# Altium PCB BLDC_Gimbal.PcbDoc (part 1 of 3)
Units mil, origin at the board's own origin, x right, y up, seen from the top; angles counter-clockwise.
Board outline 4133.86 x 2204.72 mil, 4 copper layers (Top Layer, GND, Power, Bottom Layer), stack 23.756 mil thick; 131 components, 105 nets, 517 pads, 595 vias.
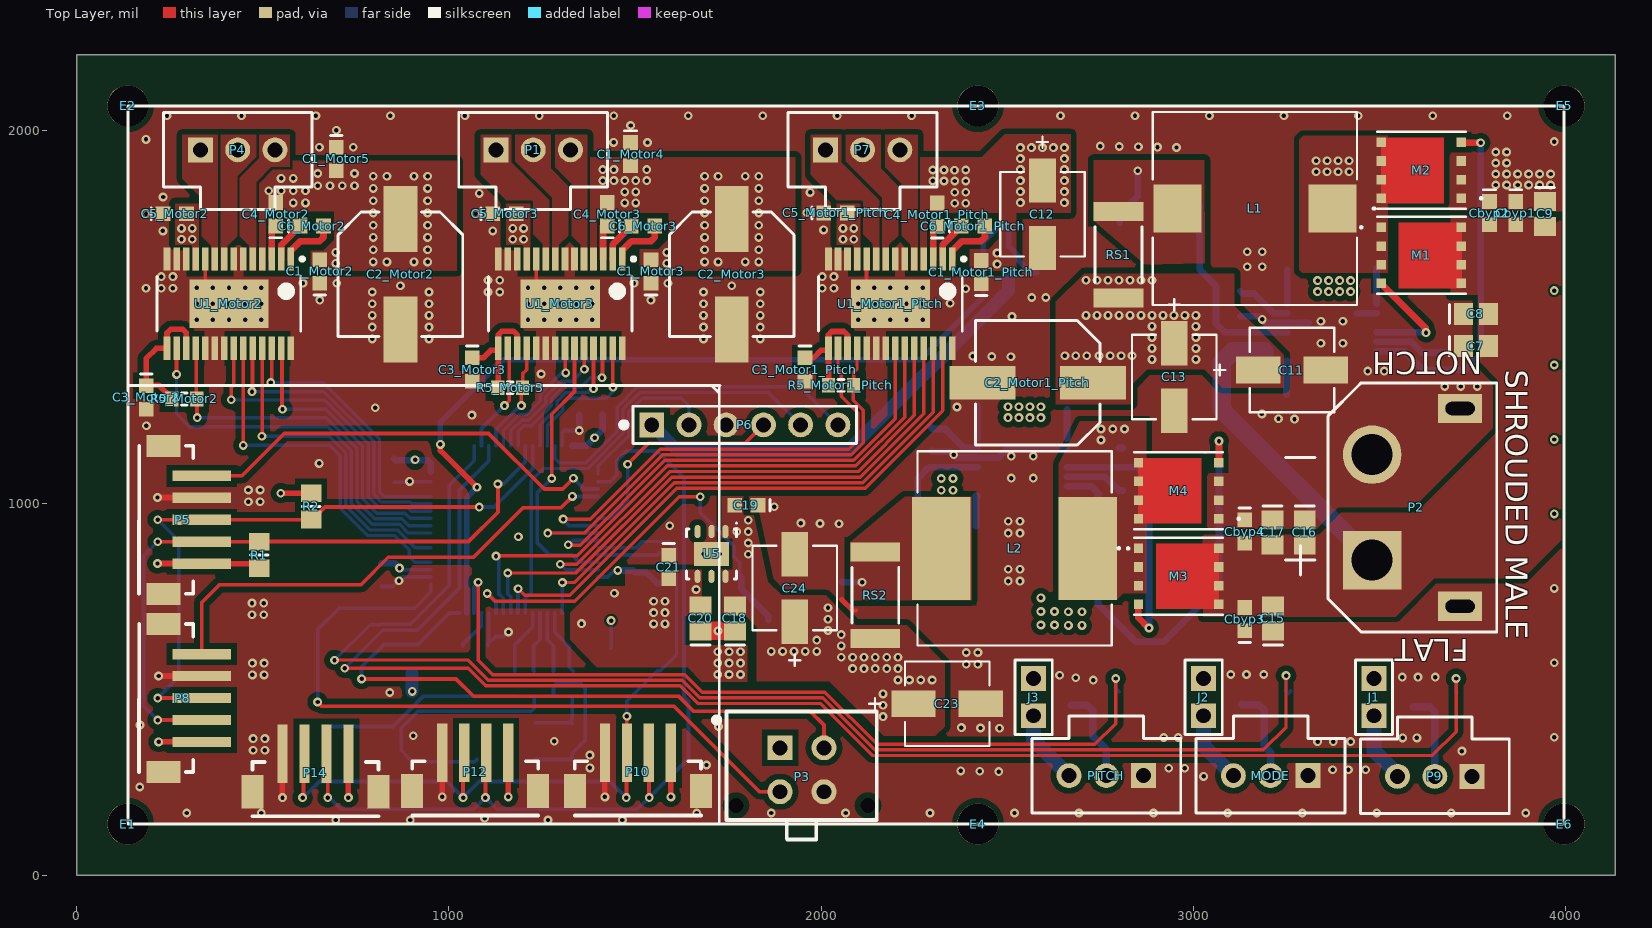
[diagram p0: Top Layer view]
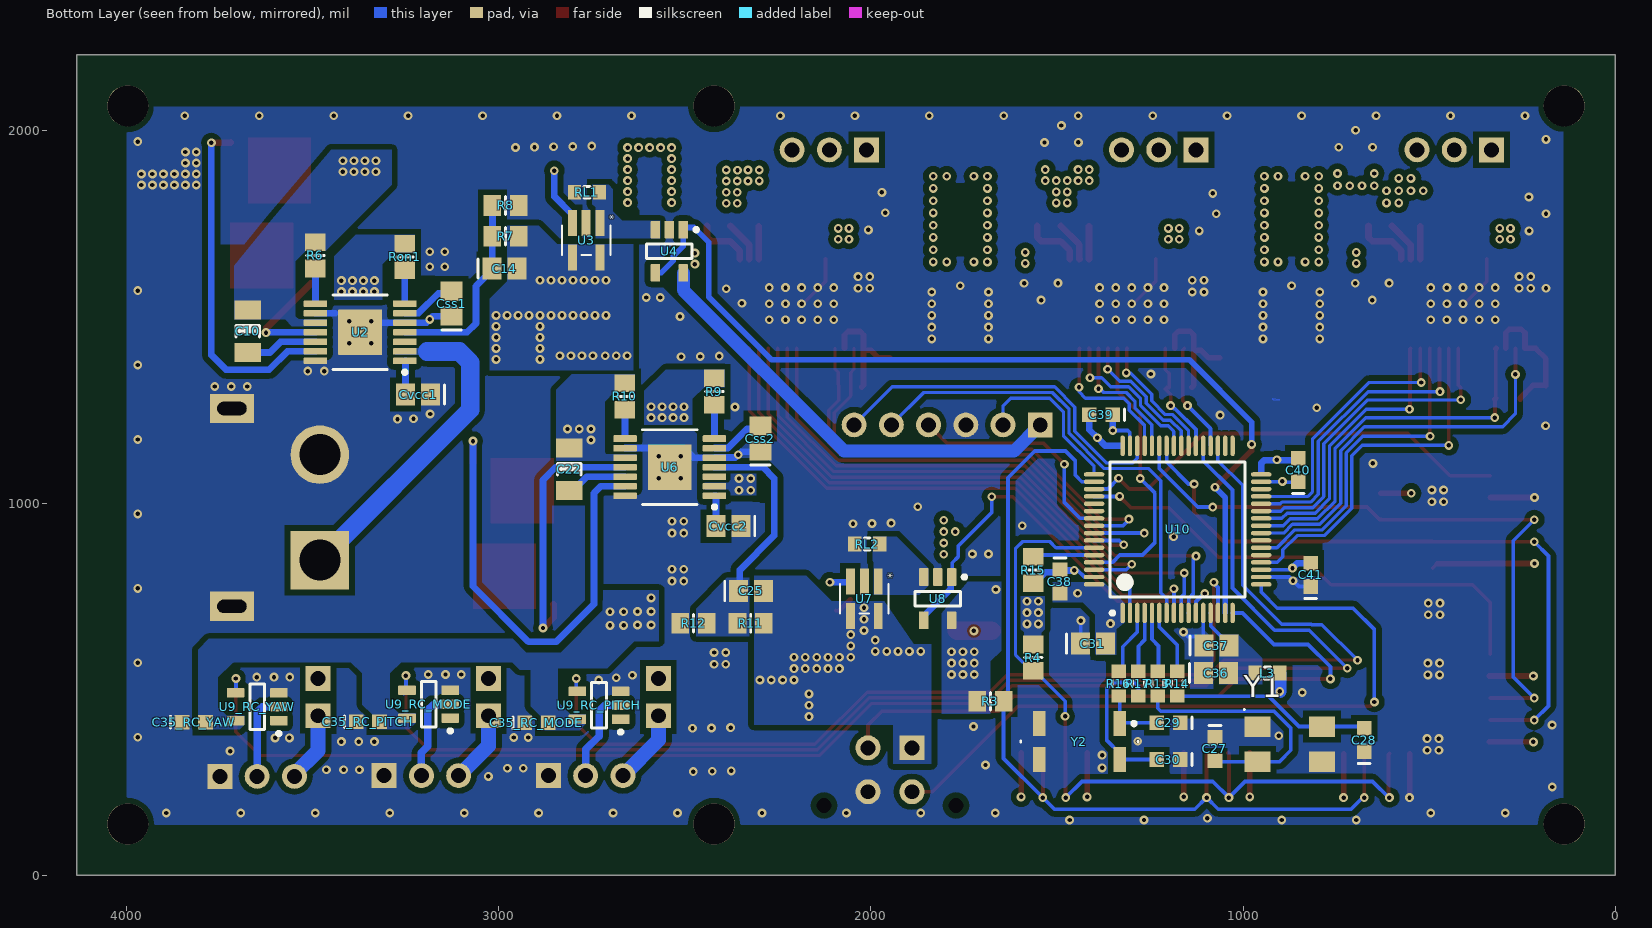
[diagram p1: Bottom Layer view, seen from below]
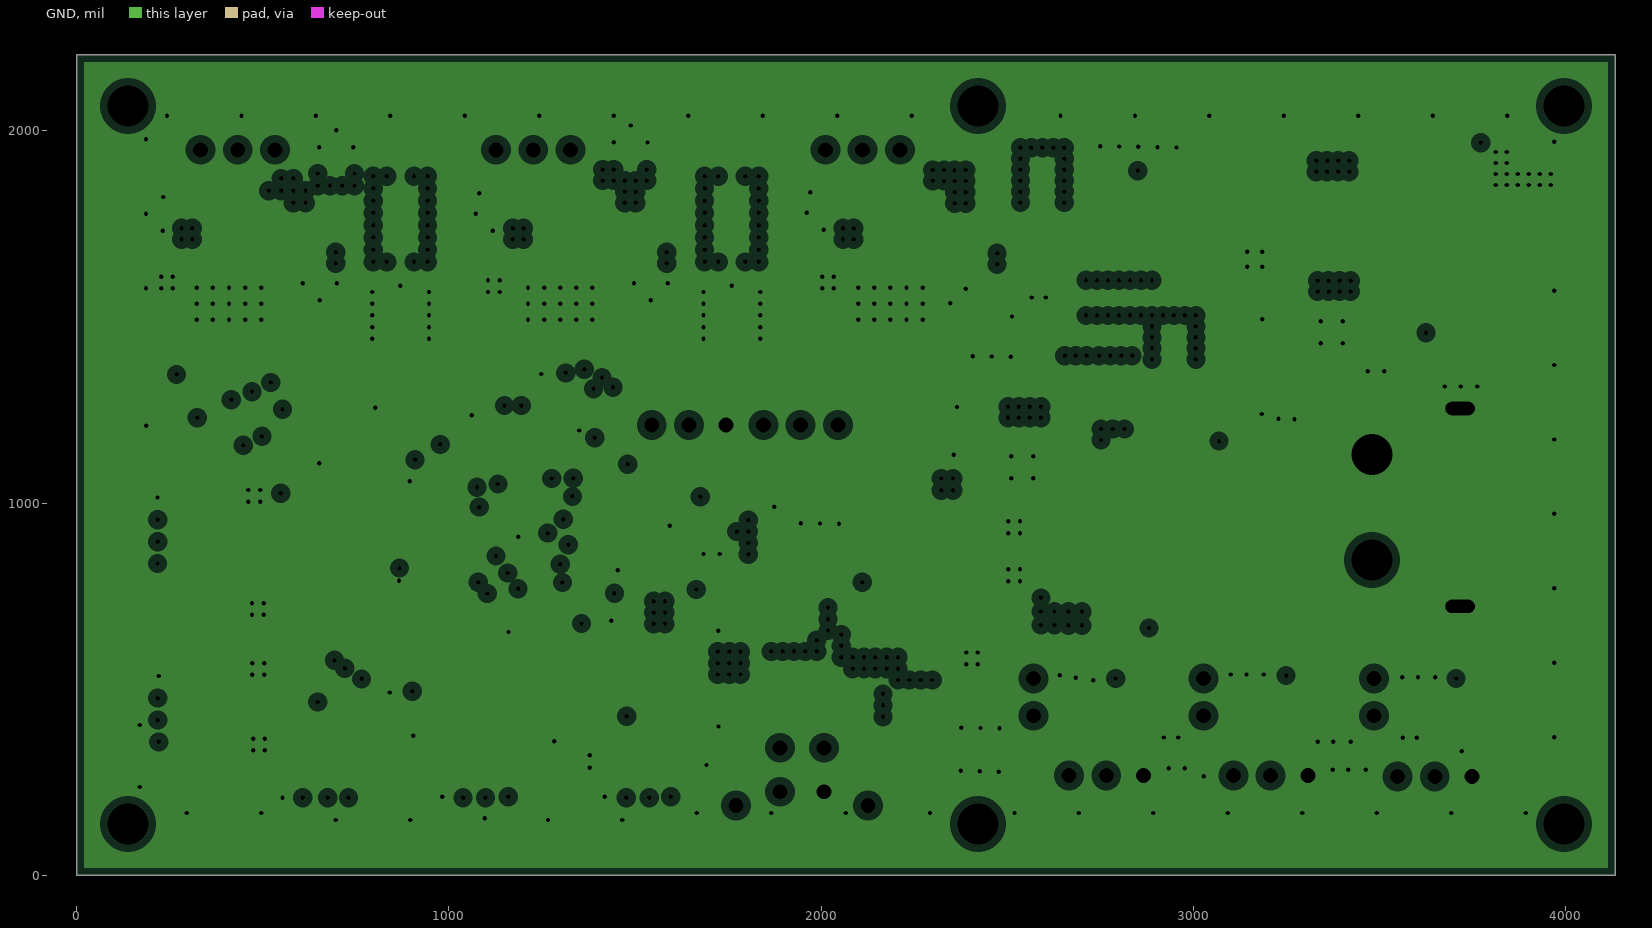
[diagram p2: GND, clearances drawn from the general rule]
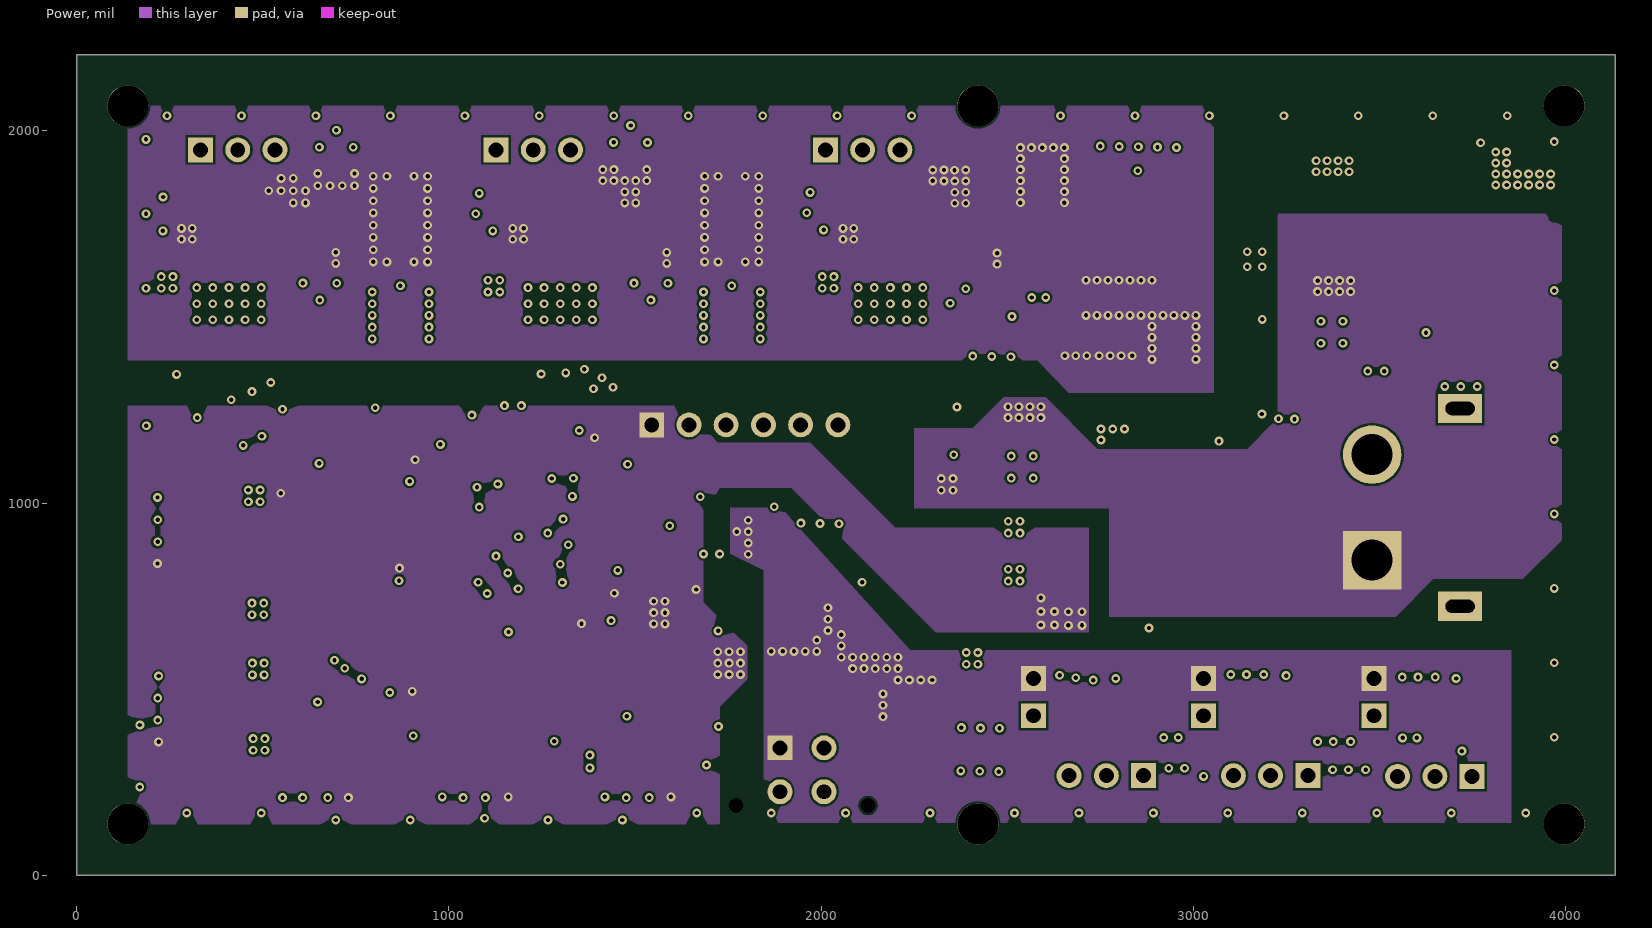
[diagram p3: Power]

## Layer stack, top to bottom
Top Solder: solder mask 0.4, Solder Resist, Dk 3.5
Top Layer: signal copper 1.4
Dielectric 2: prepreg 2.8, PP-006, Dk 4.1
GND: plane copper 1.3778, net GND
Dielectric 3: prepreg 2.8, PP-006, Dk 4.1
Power: signal copper 1.3779
Dielectric 1: dielectric 12.6, FR-4, Dk 4.8
Bottom Layer: signal copper 1.4
Bottom Solder: solder mask 0.4, Solder Resist, Dk 3.5

## Board outline
0,0 4133.86,0 4133.86,2204.72 0,2204.72

## Design rules (kind name [scope] priority, off if disabled: settings)
BoardOutlineClearance [All] p1: gap=9.84 ignorepadtopadclearanceinfootprint=FALSE
Clearance "Top Layer - GND" [InNamedPolygon('Top Layer-GND')] p1: gap=15 ignorepadtopadclearanceinfootprint=TRUE
Clearance "gnd plane clereance" [InNamedPolygon('Bottom Layer-GND')] p2: gap=15 ignorepadtopadclearanceinfootprint=FALSE
Clearance [All] p3: gap=6 ignorepadtopadclearanceinfootprint=FALSE
HoleSize [All] p1: absolutevalues=TRUE maxlimit=255.91 minlimit=1 maxpercent=80.000 minpercent=20.000
MinimumSolderMaskSliver [All] p1: minsoldermaskwidth=2
PlaneClearance [All] p1: clearance=20
PlaneConnect [All] p1: pad.planeconnectstyle=Relief pad.reliefexpansion=20 pad.reliefentries=4 pad.reliefconductorwidth=40 pad.reliefairgap=20 via.planeconnectstyle=Direct via.reliefexpansion=20 via.reliefentries=4 via.reliefconductorwidth=10 via.reliefairgap=10
PolygonConnect [All] p1: connectstyle=Direct reliefconductorwidth=10 reliefentries=4 polygonreliefangle="90 Angle" airgapwidth=10
RoutingVias [All] p1: holewidth=11.81 width=23.62 viastyle="Through Hole" minholewidth=11.81 minwidth=23.62 maxholewidth=11.81 maxwidth=23.62
SilkToSolderMaskClearance [IsPad] p1: minsilkscreentomaskgap=2 clearancetoexposedcopper=TRUE
SolderMaskExpansion [All] p1: expansion=4
Width [All] p1: maxlimit=100 minlimit=6 preferedwidth=6
25 further rules are at their usual default settings.

## Classes and differential pairs
channel class RC_Level_Shifter: RC_MODE RC_PITCH RC_YAW
channel class Motor_Driver_DRV8313: Motor1_Pitch Motor2 Motor3

## Components (designator, comment, footprint, x,y, rotation, side; value= is the part's Value field where it differs from the comment)
C1_Motor1_Pitch "100nF" "CAPC1608N(0603\")" 2430.12,1620.08 r90 top (schematic designator C1)
C1_Motor2 "100nF" "CAPC1608N(0603\")" 653.54,1622.05 r90 top (schematic designator C1)
C1_Motor3 "100nF" "CAPC1608N(0603\")" 1543.03,1622.05 r90 top (schematic designator C1)
C1_Motor4 "100nF" "CAPC1608N(0603\")" 1488.19,1937.01 r270 top
C1_Motor5 "100nF" "CAPC1608N(0603\")" 697.83,1924.21 r270 top
C2_Motor1_Pitch "100uF" CAPAE10083X105M 2581.69,1322.83 r180 top (schematic designator C2)
C2_Motor2 "100uF" CAPAE10083X105M 870.08,1614.17 r270 top (schematic designator C2)
C2_Motor3 "100uF" CAPAE10083X105M 1759.84,1614.17 r270 top (schematic designator C2)
C3_Motor1_Pitch "0.47uF" "CAPC1608N(0603\")" 1956.69,1358.27 r270 top (schematic designator C3)
C3_Motor2 "0.47uF" "CAPC1608N(0603\")" 187.01,1283.46 r270 top (schematic designator C3)
C3_Motor3 "0.47uF" "CAPC1608N(0603\")" 1062.99,1358.27 r270 top (schematic designator C3)
C4_Motor1_Pitch "100nF" "CAPC1608N(0603\")" 2312.01,1774.61 r90 top (schematic designator C4)
C4_Motor2 "100nF" "CAPC1608N(0603\")" 535.43,1775.59 r90 top (schematic designator C4)
C4_Motor3 "100nF" "CAPC1608N(0603\")" 1425.2,1775.59 r90 top (schematic designator C4)
C5_Motor1_Pitch "100nF" "CAPC1608N(0603\")" 2038.39,1779.25 r0 top (schematic designator C5)
C5_Motor2 "100nF" "CAPC1608N(0603\")" 263.78,1776.57 r0 top (schematic designator C5)
C5_Motor3 "100nF" "CAPC1608N(0603\")" 1149.61,1776.57 r0 top (schematic designator C5)
C6_Motor1_Pitch "10nF" "CAPC1608N(0603\")" 2408.46,1744.09 r0 top (schematic designator C6)
C6_Motor2 "10nF" "CAPC1608N(0603\")" 631.89,1744.09 r0 top (schematic designator C6)
C6_Motor3 "10nF" "CAPC1608N(0603\")" 1521.65,1744.09 r0 top (schematic designator C6)
C7 "C2012X5R1V156M125AC" "CAPC2012N(0805\")" 3758.86,1421.26 r0 top
C8 "C2012X5R1V156M125AC" "CAPC2012N(0805\")" 3758.86,1507.87 r0 top
C9 "C2012X5R1V156M125AC" "CAPC2012N(0805\")" 3944.88,1776.57 r270 top
C10 "ECP-U1C474MA5" "CAPC3216N(1206\")" 3674.21,1461.61 r270 bottom
C11 "20SVPF56MX" PCAP_SVP_B6-M 3264.76,1357.28 r0 top
C12 "20SVPF56MX" PCAP_SVP_B6-M 2594.49,1775.59 r270 top
C13 "20SVPF56MX" PCAP_SVP_B6-M 2948.82,1338.63 r270 top
C14 "C0805C391J5GACTU" "CAPC2012N(0805\")" 2984.25,1629.92 r180 bottom
C15 "CL21A105KBCLNNC" "CAPC2012N(0805\")" 3213.58,689.96 r90 top
C16 "CL21A105KBCLNNC" "CAPC2012N(0805\")" 3299.21,921.26 r270 top
C17 "CL21A105KBCLNNC" "CAPC2012N(0805\")" 3212.6,921.26 r270 top
C18 "CL21A105KBCLNNC" "CAPC2012N(0805\")" 1768.7,689.96 r90 top
C19 "100nF" "CAPC1608N(0603\")" 1799.21,994.09 r180 top
C20 "CL21A105KBCLNNC" "CAPC2012N(0805\")" 1676.18,689.96 r90 top
C21 "100nF" "CAPC1608N(0603\")" 1590.55,827.76 r270 top
C22 "ECP-U1C474MA5" "CAPC3216N(1206\")" 2810.04,1090.55 r270 bottom
C23 "6SVPE150M" PCAP_SVP_B6-M 2338.58,460.63 r0 top
C24 "6SVPE150M" PCAP_SVP_B6-M 1929.13,771.65 r90 top
C25 "CL21C361JBANNNC" "CAPC2012N(0805\")" 2321.85,763.78 r180 bottom
C27 "16pF" "CAPC1608N(0603\")" 1075.79,339.57 r270 bottom
C28 "16pF" "CAPC1608N(0603\")" 675.2,363.19 r90 bottom
C29 "4.3pF" "CAPC1608N(0603\")" 1200.79,409.45 r0 bottom
C30 "4.3pF" "CAPC1608N(0603\")" 1200.79,311.02 r0 bottom
C31 "4.7uF" "CAPC2012N(0805\")" 1403.54,622.05 r180 bottom
C35_RC_MODE "100nF" "CAPC1608N(0603\")" 2898.62,409.45 r180 bottom (schematic designator C35)
C35_RC_PITCH "100nF" "CAPC1608N(0603\")" 3351.38,412.4 r180 bottom (schematic designator C35)
C35_RC_YAW "100nF" "CAPC1608N(0603\")" 3818.9,411.42 r180 bottom (schematic designator C35)
C36 "CL21A105KBCLNNC" "CAPC2012N(0805\")" 1072.83,543.31 r180 bottom
C37 "10nF" "CAPC2012N(0805\")" 1071.85,617.13 r180 bottom
C38 "100nF" "CAPC1608N(0603\")" 1492.13,788.85 r270 bottom
C39 "100nF" "CAPC1608N(0603\")" 1381.89,1237.2 r0 bottom
C40 "100nF" "CAPC1608N(0603\")" 852.36,1088.58 r90 bottom
C41 "100nF" "CAPC1608N(0603\")" 818.9,807.09 r90 bottom
Cbyp1 "100nF" "CAPC1608N(0603\")" 3866.14,1778.54 r270 top
Cbyp2 "100nF" "CAPC1608N(0603\")" 3795.28,1778.54 r270 top
Cbyp3 "100nF" "CAPC1608N(0603\")" 3137.8,687.99 r90 top
Cbyp4 "100nF" "CAPC1608N(0603\")" 3137.8,923.23 r270 top
Css1 "CGA4F2C0G1H153J085AA" "CAPC2012N(0805\")" 3125.98,1535.43 r90 bottom
Css2 "CGA4F2C0G1H153J085AA" "CAPC2012N(0805\")" 2297.24,1173.23 r90 bottom
Cvcc1 "LMK212B7225KG-T" "CAPC2012N(0805\")" 3216.54,1291.34 r0 bottom
Cvcc2 "LMK212B7225KG-T" "CAPC2012N(0805\")" 2382.87,937.99 r0 bottom
E1 "#2-56 (2.8mm) Dia Hole" "2-56, Mounting Hole"#1 612.13,756.26 r0 top
E2 "#2-56 (2.8mm) Dia Hole" "2-56, Mounting Hole"#2 827.13,756.26 r0 top
E3 "#2-56 (2.8mm) Dia Hole" "2-56, Mounting Hole"#3 1042.13,756.26 r0 top
E4 "#2-56 (2.8mm) Dia Hole" "2-56, Mounting Hole"#4 1257.13,756.26 r0 top
E5 "#2-56 (2.8mm) Dia Hole" "2-56, Mounting Hole"#5 3480.31,149.6 r0 top
E6 "#2-56 (2.8mm) Dia Hole" "2-56, Mounting Hole"#6 3696.84,149.6 r0 top
J1 "3M9580-ND" "Jumper-2Pin, THT" 3485.24,428.54 r90 top
J2 "3M9580-ND" "Jumper-2Pin, THT" 3027.56,428.54 r90 top
J3 "3M9580-ND" "Jumper-2Pin, THT" 2570.87,428.54 r90 top
L1 "SRP1270-4R7M" IND_BOURNS_SRP01_large 3165.35,1791.14 r180 top
L2 "SRR1208-4R5ML" IND_BOURNS_SRR12 2519.68,877.95 r180 top
L3 "600R 350mA BEAD" "RESC1608N(0603\")" 901.57,543.31 r0 bottom
M1 "CSD18504Q5A" DQJ8 3612.2,1665.35 r0 top
M2 "CSD18537NQ5A" DQJ8 3612.2,1893.7 r180 top
M3 "CSD18537NQ5A" DQJ8 2960.63,803.15 r0 top
M4 "CSD18537NQ5A" DQJ8 2960.63,1032.87 r180 top
MODE "70543-0037" "Header-3Pin, THT, Shrouded" 3307.38,267.72 r180 top (schematic designator P11)
P1 "70543-0037" "Header-3Pin, THT, Shrouded" 1126.77,1948.82 r0 top
P2 "2x1-Pin, Pitch: 3.00mm, Battery Connector" XT60 3484.25,984.25 r180 top
P3 "43045-0412" "Header-4Pin, 2x2, THT, Locking, Tin" 1889.76,342.52 r180 top
P4 "70543-0037" "Header-3Pin, THT, Shrouded" 333.07,1948.82 r0 top
P5 "B5B-ZR-SM4-TF(LF)(SN)" "1x5-PIN ZH 1.5mm Pitch" 285,955 r90 top
P6 "68000-106HLF" "Header-6Pin, THT" 1545.08,1210 r0 top
P7 "70543-0037" "Header-3Pin, THT, Shrouded" 2011.61,1948.82 r0 top
P8 "B5B-ZR-SM4-TF(LF)(SN)" "1x5-PIN ZH 1.5mm Pitch" 285,476 r90 top
P9 "70543-0037" "Header-3Pin, THT, Shrouded" 3748.62,265.75 r180 top
P10 "B4B-ZR-SM4-TF(LF)(SN)" "1x4-PIN ZH 1.5mm Pitch" 1507.87,277.56 r180 top
P12 "B4B-ZR-SM4-TF(LF)(SN)" "1x4-PIN ZH 1.5mm Pitch" 1070.87,277.56 r180 top
P14 "B4B-ZR-SM4-TF(LF)(SN)" "1x4-PIN ZH 1.5mm Pitch" 641.73,275.59 r180 top
PITCH "70543-0037" "Header-3Pin, THT, Shrouded" 2866.14,267.72 r180 top (schematic designator P13)
R1 "4.7k" "RESC2012N(0805\")" 491.14,860.24 r270 top
R2 "4.7k" "RESC2012N(0805\")" 629.92,991.14 r90 top
R3 "4.7k" "RESC2012N(0805\")" 1679.13,467.52 r0 bottom
R4 "4.7k" "RESC2012N(0805\")" 1563.98,584.65 r90 bottom
R5_Motor1_Pitch "10.0K" "RESC1608N(0603\")" 2086.81,1315.94 r180 top (schematic designator R5)
R5_Motor2 "10.0K" "RESC1608N(0603\")" 322.83,1279.53 r180 top (schematic designator R5)
R5_Motor3 "10.0K" "RESC1608N(0603\")" 1198.33,1309.55 r180 top (schematic designator R5)
R6 "ERJ-6ENF2741V" "RESC2012N(0805\")" 3492.13,1665.35 r90 bottom
R7 "ERJ-6ENF1913V" "RESC2012N(0805\")" 2981.3,1716.54 r180 bottom
R8 "CRCW080510K0FKEA" "RESC2012N(0805\")" 2981.3,1799.21 r0 bottom
R9 "ERJ-6ENF6982V" "RESC2012N(0805\")" 2420.28,1299.21 r90 bottom
R10 "ERJ6ENF1741V" "RESC2012N(0805\")" 2661.42,1286.42 r90 bottom
R11 "ERJ-6ENF7322V" "RESC2012N(0805\")" 2322.84,677.17 r180 bottom
R12 "CRCW080510K0FKEA" "RESC2012N(0805\")" 2476.38,677.17 r180 bottom
R13 "0R" "RESC1608N(0603\")" 1229.33,548.23 r270 bottom
R14 "0R" "RESC1608N(0603\")" 1177.17,548.23 r270 bottom
R15 "CRCW080510K0FKEA" "RESC2012N(0805\")" 1563.98,819.88 r90 bottom
R16 "0R" "RESC1608N(0603\")" 1334.65,481.3 r90 bottom
R17 "0R" "RESC1608N(0603\")" 1281.5,481.3 r90 bottom
RL1 "ERA3AEB4022V" "RESC1608N(0603\")" 2796.26,1834.65 r180 bottom
RL2 "ERA3AEB4322V" "RESC1608N(0603\")" 2043.31,889.76 r180 bottom
Ron1 "CRCW0805249KFKEA" "RESC2012N(0805\")" 3251.97,1661.42 r90 bottom value=249k
RS1 "CRA2512-FZ-R010ELF" "RESC6332N(2512\")" 2799.21,1667.32 r270 top
RS2 "CRA2512-FZ-R015ELF" "RESC6332N(2512\")" 2145.67,751.97 r270 top
U1_Motor1_Pitch "DRV8313PWP" HTSSOP-28 2186.22,1535.43 r270 top (schematic designator U1)
U1_Motor2 "DRV8313PWP" HTSSOP-28 409.45,1535.43 r270 top (schematic designator U1)
U1_Motor3 "DRV8313PWP" HTSSOP-28 1299.21,1535.43 r270 top (schematic designator U1)
U2 "LM3150MH/NOPB" PWP0014A_M 3372.05,1458.66 r0 bottom
U3 "Part Number: INA139NA/3K" DBV5-M 2764.76,1705.71 r270 bottom value=Value
U4 "OPA340NA/3K" DBV0005A_M 2541.34,1676.18 r270 bottom
U5 "LD39050PU33R" LDO3_3-DFN6D_M 1705.71,863.19 r270 top
U6 "LM3150MH/NOPB" PWP0014A_M 2540.35,1096.46 r0 bottom
U7 "Part Number: INA139NA/3K" DBV5-M 2017.72,742.85 r270 bottom value=Value
U8 "OPA340NA/3K" DBV0005A_M 1820.87,743.11 r270 bottom
U9_RC_MODE "SN74LV1T34DBVR" DBV0005A_M 3187.99,459.65 r0 bottom (schematic designator U9)
U9_RC_PITCH "SN74LV1T34DBVR" DBV0005A_M 2730.32,456.69 r0 bottom (schematic designator U9)
U9_RC_YAW "SN74LV1T34DBVR" DBV0005A_M 3648.62,452.76 r0 bottom (schematic designator U9)
U10 "STM32F303RET6" STM-LQFP64_M 1176.18,929.13 r90 bottom
Y1 "8MHz" "CRYSTAL 4-SMD, 3.60x6.00mm" 875,352.36 r180 bottom
Y2 "32.768kHz" SOJ550P380X260-4M 1439.96,359.25 r270 bottom

## Footprints (in the part's own frame and the unit in brackets; to place one, negate y for a bottom-side part, rotate by r counter-clockwise, add the part's x,y. Pads: shape width x height; smd on the part's side, far side on the other; paste and mask are expansions set on the pad)
"1x4-PIN ZH 1.5mm Pitch" [mm]
  rect 0.7x4 smd: 1(-2.25,-1.3) 2(-0.75,-1.3) 3(0.75,-1.3) 4(2.25,-1.3)
  rect 1.5x2.3 smd: ""(-4.3,1.3) ""(4.3,1.3)
  silkscreen extent -4.3,-0.72 4.3,2.98, body extent -3.75,-2.2 3.75,3, height 5
"1x5-PIN ZH 1.5mm Pitch" [mm]
  rect 0.7x4 smd: 1(-3,-1.3) 2(-1.5,-1.3) 3(0,-1.3) 4(1.5,-1.3) 5(3,-1.3)
  rect 1.5x2.3 smd: ""(-5.05,1.3) ""(5.05,1.3)
  silkscreen extent -5.05,-0.72 5.05,2.98, body extent -3.7,-2.24 3.8,2.96, height 5
"2-56, Mounting Hole"#1 [mm] "2.44mm Dia, 2.8mm Max, Mounting Hole"
  round 2.8 hole 2.8 mask+0: 0(-12.048,-15.709)
"2-56, Mounting Hole"#2 [mm] "2.44mm Dia, 2.8mm Max, Mounting Hole"
  round 2.8 hole 2.8 mask+0: 0(-17.509,33.291)
"2-56, Mounting Hole"#3 [mm] "2.44mm Dia, 2.8mm Max, Mounting Hole"
  round 2.8 hole 2.8 mask+0: 0(35.03,33.291)
"2-56, Mounting Hole"#4 [mm] "2.44mm Dia, 2.8mm Max, Mounting Hole"
  round 2.8 hole 2.8 paste+0 mask+0: 0(29.569,-15.709)
"2-56, Mounting Hole"#5 [mm] "2.44mm Dia, 2.8mm Max, Mounting Hole"
  round 2.8 hole 2.8 mask+0: 0(13.1,48.7)
"2-56, Mounting Hole"#6 [mm] "2.44mm Dia, 2.8mm Max, Mounting Hole"
  round 2.8 hole 2.8 paste+0 mask+0: 0(7.6,-0.3)
CAPAE10083X105M [mm] "Aluminum Electrolytic Capacitor, Body 8.30x8.30x10.50mm, IPC Low Density"
  rect 4.5x2.3 smd: 1(-3.775,0) 2(3.775,0)
  silkscreen extent -4.25,-4.25 4.25,4.25, body extent -4.25,-4.25 4.25,4.25, height 10.5
"CAPC1608N(0603\")" [mm] "Chip Capacitor, Body 1.6x0.8mm (0603\"), IPC Medium Density"
  rect 1x1 smd: 1(-0.8,0) 2(0.8,0)
  silkscreen extent -1.6,-0.4 -1.6,0.4, body extent -0.87,-0.48 0.87,0.48, height 0.85
"CAPC2012N(0805\")" [mm] "Chip Capacitor, Body 2.0x1.3mm (0805\"), IPC Medium Density"
  rect 1.3x1.5 smd: 1(-0.85,0) 2(0.85,0)
  silkscreen extent -1.8,-0.65 -1.8,0.65, body extent -1.1,-0.72 1.1,0.72, height 1.1
"CAPC3216N(1206\")" [mm] "Chip Capacitor, Body 3.2x1.6mm (1206\"), IPC Medium Density"
  rect 1.3x1.8 smd: 1(-1.45,0) 2(1.45,0)
  silkscreen extent -0.4,-0.8 0.4,0.8, body extent -1.7,-0.9 1.7,0.9, height 1.35
"CRYSTAL 4-SMD, 3.60x6.00mm" [mm] "DFN, 4-Leads, Body 3.60x6.00mm, Pitch 4.40mm, IPC Medium Density"
  rect 1.8x1.4 smd: 1(-2.2,-1.2) 2(2.2,-1.2) 3(2.2,1.2) 4(-2.2,1.2)
  silkscreen extent -3.15,2.3 -3.05,2.4, body extent -3.1,-1.95 3.1,1.95, height 1.2
DBV5-M [mil]
  rect 70x24 smd paste+0 mask+0: 1(-46,37.4) 2(-46,0) 3(-46,-37.4) 4(46,-37.4) 5(46,37.4)
  silkscreen extent -40,-65 40,65, body extent -59,-60 59,60, height 57
DBV0005A_M [mm] "SOT23, 5-Leads, Body 3.05x1.75mm, Pitch 0.95mm, IPC Low Density"
  rrect15% 1.2x0.65 smd: 1(-1.475,0.95) 2(-1.475,0) 3(-1.475,-0.95) 4(1.475,-0.95) 5(1.475,0.95)
  silkscreen extent -1.6,-1.55 0.5,1.95, body extent -1.42,-1.46 1.42,1.46, height 1.08
DQJ8 [mm]
  rect 0.63x0.65 smd paste-0.1: 1(-2.735,1.905) 2(-2.735,0.635) 3(-2.735,-0.635) 4(-2.735,-1.905) 5(2.735,-1.905) 6(2.735,-0.635) 7(2.735,0.635) 8(2.735,1.905)
  Top Layer region: 2.745,0 2.745,2.23 -1.545,2.23 -1.545,0
  Top Layer region: 2.745,0 2.745,-2.23 -1.545,-2.23 -1.545,0
  silkscreen extent -4.17,-2.63 3.03,2.63, body extent 0,0 0.25,0.25, height 0.25
"Header-3Pin, THT, Shrouded" [mm] "Header, 3-Pin, 0.1\" Pitch, Shrouded, THT"
  rect 1.7x1.7 hole 1.02: 1(0,0)
  round 1.7 hole 1.02: 2(2.54,0) 3(5.08,0)
  silkscreen extent -2.54,-4.06 7.62,2.54, body extent -2.54,-4.06 7.62,2.54, height 11.81
"Header-4Pin, 2x2, THT, Locking, Tin" [mm] "Header, 4-Pin, 2x2, 3mm Pitch, Locking, Shrouded, THT, Tin"
  round 0 hole 1.02 unplated: 0(-6,3.94) 0(3,3.94)
  rect 1.7x1.7 hole 1.02: 1(0,0)
  round 1.7 hole 1.02: 2(-3,0) 3(0,3) 4(-3,3)
  silkscreen extent -6.6,-2.47 4.45,6.26, body extent -6.58,-2.44 3.57,6.32, height 9.95
"Header-6Pin, THT" [mm] "Header, 6-Pin, 0.1\" Pitch, Unshrouded, THT"
  rect 1.7x1.7 hole 1.02: 1(0,0)
  round 1.7 hole 1.02: 2(2.54,0) 3(5.08,0) 4(7.62,0) 5(10.16,0) 6(12.7,0)
  silkscreen extent -2.03,-1.27 13.97,1.27, body extent -1.27,-1.27 13.97,1.27, height 8.89
HTSSOP-28 [mm] "TSOP, 28-Leads, Body 9.70x4.40mm, Pitch 0.65mm, Thermal Pad 5.18x3.10mm, IPC Medium Density"
  rect 1.6x0.45 smd: 1(-3.05,4.225) 2(-3.05,3.575) 3(-3.05,2.925) 4(-3.05,2.275) 5(-3.05,1.625) 6(-3.05,0.975) 7(-3.05,0.325) 8(-3.05,-0.325) 9(-3.05,-0.975) 10(-3.05,-1.625) 11(-3.05,-2.275) 12(-3.05,-2.925) 13(-3.05,-3.575) 14(-3.05,-4.225) 15(3.05,-4.225) 16(3.05,-3.575) 17(3.05,-2.925) 18(3.05,-2.275) 19(3.05,-1.625) 20(3.05,-0.975) 21(3.05,-0.325) 22(3.05,0.325) 23(3.05,0.975) 24(3.05,1.625) 25(3.05,2.275) 26(3.05,2.925) 27(3.05,3.575) 28(3.05,4.225)
  rect 3.3x5.4 smd: 29(0,0)
  silkscreen extent -3.17,-4.9 1.85,5.13, body extent -2.25,-4.9 2.25,4.9, height 1.2
IND_BOURNS_SRP01_large [mil]
  rect 129x130 smd paste+0 mask+0: 1(-208,0) 2(208,0)
  silkscreen extent -322,-259 275,259, body extent -269,-254 269,254, height 278
IND_BOURNS_SRR12 [mil]
  rect 157x276 smd paste+0 mask+0: 1(-196.5,0) 2(196.5,0)
  silkscreen extent -308,-261 261,261, body extent -256,-256 256,256, height 335
"Jumper-2Pin, THT" [mm] "Jumper, 2-Pin, 0.1\" Pitch, Unshrouded, THT"
  rect 1.7x1.7 hole 1.02: 1(0,0) 2(2.54,0)
  silkscreen extent -1.27,-1.27 3.81,1.27, body extent -1.27,-1.27 3.81,1.27, height 5.84
LDO3_3-DFN6D_M [mm] "SON, 6-Leads, Body 3x3mm, Pitch 0.95mm, Thermal Pad 2.4x1.65mm, IPC Low Density"
  oval 0.9x0.4 smd: 1(-1.525,0.95) 2(-1.525,0) 3(-1.525,-0.95) 4(1.525,-0.95) 5(1.525,0) 6(1.525,0.95)
  rect 1.65x2.4 smd: 7(0,0)
  silkscreen extent -2.15,-1.7 1.7,1.75, body extent -1.55,-1.55 1.55,1.55, height 0.95
PCAP_SVP_B6-M [mil]
  rect 119x72 smd paste+0 mask+0: 1(-90.5,0) 2(90.5,0)
  silkscreen extent -209,-114 114,114, body extent -122,-108 122,109, height 238
PWP0014A_M [mm] "SOP, 14-Leads, Body 5.1x4.5mm, Pitch 0.65mm, Thermal Pad 3x3.1mm, IPC Low Density"
  rrect22% 1.6x0.45 smd: 1(-3.05,1.95) 2(-3.05,1.3) 3(-3.05,0.65) 4(-3.05,0) 5(-3.05,-0.65) 6(-3.05,-1.3) 7(-3.05,-1.95) 8(3.05,-1.95) 9(3.05,-1.3) 10(3.05,-0.65) 11(3.05,0) 12(3.05,0.65) 13(3.05,1.3) 14(3.05,1.95)
  rrect3% 3x3.1 smd: 15(0,0)
  silkscreen extent -3.17,-2.55 1.85,2.85, body extent -3.21,-2.5 3.21,2.5, height 1
"RESC1608N(0603\")" [mm] "Chip Resistor, Body 1.6x0.8mm (0603\"), IPC Medium Density"
  rect 0.9x1 smd: 1(0,0) 2(1.7,0)
  silkscreen extent 0.65,-0.4 1.05,0.4, body extent 0,-0.48 1.7,0.48, height 0.6
"RESC2012N(0805\")" [mm] "Chip Resistor, Body 2.0x1.3mm (0805\"), IPC Medium Density"
  rect 1.2x1.4 smd: 1(-0.9,0) 2(0.9,0)
  silkscreen extent 0,-0.6 0,0.6, body extent -1.07,-0.7 1.07,0.7, height 0.65
"RESC6332N(2512\")" [mm] "Chip Resistor, Body 6.3x3.2mm (2512\"), IPC Medium Density"
  rect 1.3x3.4 smd: 1(-2.95,0) 2(2.95,0)
  silkscreen extent -1.9,-1.6 1.9,1.6, body extent -3.22,-1.68 3.22,1.68, height 0.71
SOJ550P380X260-4M [mm] "SOJ, 4-Leads, Body 8.00x3.80mm, Pitch 5.50mm, IPC Low Density"
  rect 1.7x0.85 smd: 1(-1.225,2.75) 2(-1.225,-2.75) 3(1.225,-2.75) 4(1.225,2.75)
  silkscreen extent -1.35,-4 0.03,4, body extent -1.9,-4 1.9,4, height 2.6
STM-LQFP64_M [mm] "QFP, 64-Leads, Body 10x10mm, Pitch 0.5mm, IPC Low Density"
  oval 1.4x0.3 smd: 1(-5.7,3.75) 2(-5.7,3.25) 3(-5.7,2.75) 4(-5.7,2.25) 5(-5.7,1.75) 6(-5.7,1.25) 7(-5.7,0.75) 8(-5.7,0.25) 9(-5.7,-0.25) 10(-5.7,-0.75) 11(-5.7,-1.25) 12(-5.7,-1.75) 13(-5.7,-2.25) 14(-5.7,-2.75) 15(-5.7,-3.25) 16(-5.7,-3.75) 33(5.7,-3.75) 34(5.7,-3.25) 35(5.7,-2.75) 36(5.7,-2.25) 37(5.7,-1.75) 38(5.7,-1.25) 39(5.7,-0.75) 40(5.7,-0.25) 41(5.7,0.25) 42(5.7,0.75) 43(5.7,1.25) 44(5.7,1.75) 45(5.7,2.25) 46(5.7,2.75) 47(5.7,3.25) 48(5.7,3.75)
  oval 0.3x1.4 smd: 17(-3.75,-5.7) 18(-3.25,-5.7) 19(-2.75,-5.7) 20(-2.25,-5.7) 21(-1.75,-5.7) 22(-1.25,-5.7) 23(-0.75,-5.7) 24(-0.25,-5.7) 25(0.25,-5.7) 26(0.75,-5.7) 27(1.25,-5.7) 28(1.75,-5.7) 29(2.25,-5.7) 30(2.75,-5.7) 31(3.25,-5.7) 32(3.75,-5.7) 49(3.75,5.7) 50(3.25,5.7) 51(2.75,5.7) 52(2.25,5.7) 53(1.75,5.7) 54(1.25,5.7) 55(0.75,5.7) 56(0.25,5.7) 57(-0.25,5.7) 58(-0.75,5.7) 59(-1.25,5.7) 60(-1.75,5.7) 61(-2.25,5.7) 62(-2.75,5.7) 63(-3.25,5.7) 64(-3.75,5.7)
  silkscreen extent -5.82,-4.6 4.6,4.6, body extent -5,-5 5,5, height 1.6
XT60 [mm]
  rect 4x4 hole 2.8: 1(0.1,3.5)
  rect 3x2 hole 0.9 slot 2 at 0 deg: 2(-5.9,6.65) 2(-5.9,-6.85)
  round 4 hole 2.8: 2(0.1,-3.7)
  silkscreen extent -8.4,-8.6 6,8.4, body extent -16.29,-7.88 1.91,7.62, height 8.8

## Part data
C1_Motor1_Pitch C1_Motor2 C1_Motor3 C1_Motor4 C1_Motor5 C4_Motor1_Pitch C4_Motor2 C4_Motor3 C5_Motor1_Pitch C5_Motor2 C5_Motor3 C19 C21 C35_RC_MODE C35_RC_PITCH C35_RC_YAW C38 C39 C40 C41 Cbyp1 Cbyp2 Cbyp3 Cbyp4: library part CL10B104KB8SFNC, "CAP CER 0.1UF 50V X7R 0603", Case/Package=0603, Case Code (Metric)=1608, Dielectric=X7R, Manufacturer=Samsung, Max Operating Temperature=125°C, Min Operating Temperature=-55°C, Package Quantity=4000, Supplier Part Number 1=1276-1936-1-ND, Tolerance=10%, Voltage Rating=50V, Capacitance=100nF, Case Code (Imperial)=0603, ComponentLink1Description=https://datasheet.ciiva.com/25714/cl10b104kb8sfnc-25714514.pdf?src-supplier=Digi-Key, ComponentLink1URL=https://datasheet.ciiva.com/25714/cl10b104kb8sfnc-25714514.pdf?src-supplier=Digi-Key, Contact Plating=Tin, Depth=0.8mm, Features="Soft Termination", Height=0.8mm, Lead Free="Lead Free", Length=1.6mm, Manufacturer Part Number=CL10B104KB8SFNC, Mount="Surface Mount", Packaging="Tape and Reel", Pricing 1="1 = 0.10000, 10 = 0.02900, 100 = 0.01300, 500 = 0.00928, 1000 = 0.00729 (USD)", Radiation Hardening=No, RoHS=Yes, Stock 1=1859763, Supplier 1=Digi-Key, Thickness=0.035inch, Width=0.031inch
C2_Motor1_Pitch C2_Motor2 C2_Motor3: library part "100uF 50V, SMD, Alum, Polarized", "Capacitor, Polarized, Aluminum, 50V, +/- 20%, SMD", Supplier Part Number 1=PCE3917CT-ND, Voltage=50V, LatestRevisionDate=2017-11-16, Mfg=Panasonic, Mfg#=EEE-1HA101UP, PackageDescription="Radial, Can - SMD", Published=2017-11-16, Publisher="UVic AERO, Taylor Long", Supplier 1=Digi-Key
C3_Motor1_Pitch C3_Motor2 C3_Motor3: library part "0.47uF 6.3V 0603 SMD, Ceramic", "Capacitor, Ceramic, 6.3V, +/- 10%, 0603 SMD, X7R", Supplier Part Number 1=490-6416-1-ND, Voltage=6.3V, LatestRevisionDate=2017-11-16, Mfg="Murata Electronics North America", Mfg#=GRM188R70J474KA01D, PackageDescription="Chip Capacitor", Published=2017-11-16, Publisher="UVic AERO, Taylor Long", Supplier 1=Digi-Key
C6_Motor1_Pitch C6_Motor2 C6_Motor3: library part "10nF 50V 0603 SMD, Ceramic", "Capacitor, Ceramic, 50V, +/- 10%, 0603 SMD, X7R", Supplier Part Number 1=399-1091-1-ND, Voltage=50V, PackageDescription="Chip Capacitor", Published="March 28, 2012", Publisher="UVic AERO", Supplier 1=Digi-Key
C7 C8 C9: "CAP CER 15UF 35V X5R 0805", Capacitance=15uF, Case/Package=0805, Case Code (Metric)=2012, Dielectric=X5R, Dielectric Material=Ceramic, Manufacturer=TDK, Max Operating Temperature=85°C, Min Operating Temperature=-55°C, Package Quantity=2000, Supplier Part Number 1=445-14423-1-ND, Tolerance=20%, Voltage Rating=35V, Case Code (Imperial)=0805, ComponentLink1Description=https://datasheet.ciiva.com/14893/tdkmlcccaprange-14893918.pdf?src-supplier=Digi-Key, ComponentLink1URL=https://datasheet.ciiva.com/14893/tdkmlcccaprange-14893918.pdf?src-supplier=Digi-Key, ComponentLink2Description=https://datasheet.ciiva.com/14893/tdkmlcccaprange-14893919.pdf?src-supplier=Digi-Key, ComponentLink2URL=https://datasheet.ciiva.com/14893/tdkmlcccaprange-14893919.pdf?src-supplier=Digi-Key, Composition=Ceramic, Height=1.25mm, Lead Free="Lead Free", Length=0.079inch, Manufacturer Part Number=C2012X5R1V156M125AC, Mount="Surface Mount", Packaging="Tape and Reel", Pricing 1="1 = 0.85000, 10 = 0.62800, 100 = 0.43060, 500 = 0.34086, 1000 = 0.28704 (USD)", RoHS=Yes, Stock 1=48431, Supplier 1=Digi-Key, Termination=SMD/SMT, Thickness=0.057inch, Voltage Rating (DC)=35V, Width=0.049inch
C10 C22: "CAP FILM 0.47UF 20% 16VDC 1206", Capacitance=470nF, Case/Package=1206, Case Code (Metric)=3216, Dielectric=PPS, Insulation Resistance=141MR, Manufacturer=Panasonic, Max Operating Temperature=85°C, Min Operating Temperature=-40°C, Package Quantity=2000, Supplier Part Number 1=PCF1130CT-ND, Tolerance=20%, Voltage=16V, Case Code (Imperial)=1206, ComponentLink1Description=https://datasheet.ciiva.com/11791/0900766b80f2ea72-11791506.pdf?src-supplier=RSComponents, ComponentLink1URL=https://datasheet.ciiva.com/11791/0900766b80f2ea72-11791506.pdf?src-supplier=RSComponents, ComponentLink2Description=https://datasheet.ciiva.com/15163/getdatasheetpartid-239730-15163927.pdf?src-supplier=Verical, ComponentLink2URL=https://datasheet.ciiva.com/15163/getdatasheetpartid-239730-15163927.pdf?src-supplier=Verical, ComponentLink3Description=https://datasheet.ciiva.com/11444/abd0000ce12-11444520.pdf?src-supplier=Avnet, ComponentLink3URL=https://datasheet.ciiva.com/11444/abd0000ce12-11444520.pdf?src-supplier=Avnet, ComponentLink4Description=https://datasheet.ciiva.com/17630/abd0000ce12-17630652.pdf?src-supplier=Avnet+Europe, ComponentLink4URL=https://datasheet.ciiva.com/17630/abd0000ce12-17630652.pdf?src-supplier=Avnet+Europe, ComponentLink5Description=https://datasheet.ciiva.com/5710/31740-5710142.pdf?src-supplier=Farnell, ComponentLink5URL=https://datasheet.ciiva.com/5710/31740-5710142.pdf?src-supplier=Farnell, ComponentLink6Description=https://datasheet.ciiva.com/2992/abd0000ce12-2992996.pdf?src-supplier=Avnet, ComponentLink6URL=https://datasheet.ciiva.com/2992/abd0000ce12-2992996.pdf?src-supplier=Avnet, ComponentLink7Description=https://datasheet.ciiva.com/46400/31740-46400042.pdf?src-supplier=Element14, ComponentLink7URL=https://datasheet.ciiva.com/46400/31740-46400042.pdf?src-supplier=Element14, ComponentLink8Description=https://datasheet.ciiva.com/46400/31740-46400043.pdf?src-supplier=Element14, ComponentLink8URL=https://datasheet.ciiva.com/46400/31740-46400043.pdf?src-supplier=Element14, Contact Plating=Copper, Depth=1.6mm, Height=1.4mm, Height - Seated (Max)=0.063inch, Lead Free="Lead Free", Length=3.2mm, Manufacturer Part Number=ECP-U1C474MA5, Mount="Surface Mount", Packaging="Tape and Reel", Pricing 1="1 = 0.67000, 10 = 0.49500, 100 = 0.33950, 500 = 0.26876, 1000 = 0.22632 (USD)", Radiation Hardening=No, REACH SVHC="No SVHC", RoHS=Yes, Stock 1=70076, Supplier 1=Digi-Key, Termination=SMD/SMT, Voltage Rating=16V, Voltage Rating (DC)=16V, Width=1.6mm
C11 C12 C13: "CAP ALUM POLY 56UF 20% 20V SMD", Capacitance=56uF, Case/Package=Radial, ESR (Equivalent Series Resistance)=30mR, Leakage Current=224uA, Manufacturer=Panasonic, Max Operating Temperature=105°C, Min Operating Temperature=-55°C, Package Quantity=1500, Ripple Current=2.8A, Supplier Part Number 1=P16502CT-ND, Tolerance=20%, Voltage=20V, ComponentLink1Description=https://datasheet.ciiva.com/25746/1734360-25746730.pdf?src-supplier=Farnell, ComponentLink1URL=https://datasheet.ciiva.com/25746/1734360-25746730.pdf?src-supplier=Farnell, ComponentLink2Description=https://datasheet.ciiva.com/24066/svpf-os-262415-24066271.pdf?src-supplier=Mouser, ComponentLink2URL=https://datasheet.ciiva.com/24066/svpf-os-262415-24066271.pdf?src-supplier=Mouser, ComponentLink3Description=https://datasheet.ciiva.com/48542/svpf-eng-ds-48542383.pdf?src-supplier=Distrelec, ComponentLink3URL=https://datasheet.ciiva.com/48542/svpf-eng-ds-48542383.pdf?src-supplier=Distrelec, Diameter=5mm, Dissipation Factor=12%, Height=5.9mm, Height - Seated (Max)=0.236inch, Length=5.9mm, Life (Hours)=5000Hour, Manufacturer Part Number=20SVPF56MX, Mount="Surface Mount", Number of Pins=6, Packaging="Tape and Reel", Polarity=Polar, Pricing 1="1 = 1.02000, 10 = 0.80900, 100 = 0.60650, 500 = 0.45826 (USD)", REACH SVHC="No SVHC", Ripple Current (AC)=2.8A, RoHS=Yes, Stock 1=4599, Supplier 1=Digi-Key, Termination=SMD/SMT, Voltage Rating=20V, Voltage Rating (DC)=20V
C14: "CAP CER 390PF 50V C0G/NP0 0805", Capacitance=390pF, Case/Package=0805, Case Code (Metric)=2012, Dielectric=C0G, Dielectric Material=Ceramic, Manufacturer=KEMET, Max Operating Temperature=125°C, Min Operating Temperature=-55°C, Package Quantity=1, Supplier Part Number 1=399-1132-1-ND, Tolerance=5%, Voltage=50V, Case Code (Imperial)=0805, ComponentLink1Description=https://datasheet.ciiva.com/144/docfinderpartnumber-c0805c391j5gactu-144976.pdf?src-supplier=Digi-Key, ComponentLink1URL=https://datasheet.ciiva.com/144/docfinderpartnumber-c0805c391j5gactu-144976.pdf?src-supplier=Digi-Key, ComponentLink2Description=https://datasheet.ciiva.com/18100/getdatasheetpartid-35246-18100917.pdf?src-supplier=Verical, ComponentLink2URL=https://datasheet.ciiva.com/18100/getdatasheetpartid-35246-18100917.pdf?src-supplier=Verical, ComponentLink3Description=https://datasheet.ciiva.com/14601/70095383-14601640.pdf?src-supplier=Allied+Electronics, ComponentLink3URL=https://datasheet.ciiva.com/14601/70095383-14601640.pdf?src-supplier=Allied+Electronics, ComponentLink4Description=https://datasheet.ciiva.com/7842/1372242-7842602.pdf?src-supplier=Element14, ComponentLink4URL=https://datasheet.ciiva.com/7842/1372242-7842602.pdf?src-supplier=Element14, ComponentLink5Description=https://datasheet.ciiva.com/49516/1567367-49516570.pdf?src-supplier=Jameco, ComponentLink5URL=https://datasheet.ciiva.com/49516/1567367-49516570.pdf?src-supplier=Jameco, Contact Material=Tin, Depth=1.25mm, Dissipation Factor=0.1%, Height=0.78mm, Lead Free="Lead Free", Lead Pitch=0.75mm, Length=2mm, Manufacturer Part Number=C0805C391J5GACTU, Mount="Surface Mount", Packaging="Tape and Reel", Pricing 1="1 = 0.16000, 10 = 0.11500, 100 = 0.05400, 500 = 0.03788, 1000 = 0.03136 (USD)", Radiation Hardening=No, REACH SVHC="No SVHC", RoHS=Yes, Stock 1=200410, Supplier 1=Digi-Key, Termination=SMD/SMT, Thickness=0.035inch, Voltage Rating=50V, Voltage Rating (DC)=50V, Width=0.049inch
C15 C16 C17 C18 C20 C36: "CAP CER 1uF 50V X5R 10% SMD 0805 85C Cardboard T/R", Capacitance=1uF, Case/Package=0805, Case Code (Metric)=2012, Dielectric=X5R, Manufacturer=Samsung, Max Operating Temperature=85°C, Min Operating Temperature=-55°C, Package Quantity=1, Supplier Part Number 1=1276-2396-1-ND, Tolerance=10%, Voltage Rating=50V, Case Code (Imperial)=0805, ComponentLink1Description=https://datasheet.ciiva.com/25775/cl21a105kbclnnc-25775425.pdf?src-supplier=Digi-Key, ComponentLink1URL=https://datasheet.ciiva.com/25775/cl21a105kbclnnc-25775425.pdf?src-supplier=Digi-Key, Depth=1.25mm, Height=0.85mm, Lead Free="Lead Free", Length=2mm, Manufacturer Part Number=CL21A105KBCLNNC, Mount="Surface Mount", Packaging="Tape and Reel", Pricing 1="1 = 0.17000, 10 = 0.11400, 100 = 0.05780, 500 = 0.03954, 1000 = 0.03498 (USD)", Radiation Hardening=No, RoHS=Yes, Stock 1=343658, Supplier 1=Digi-Key, Thickness=0.037inch, Width=0.049inch
C23 C24: "CAP ALUM POLY 150UF 20% 6.3V SMD", Capacitance=150uF, Case/Package=Radial, ESR (Equivalent Series Resistance)=12mR, Leakage Current=500uA, Manufacturer=Panasonic, Max Operating Temperature=105°C, Min Operating Temperature=-55°C, Package Quantity=1500, Ripple Current=3.52A, Supplier Part Number 1=P16614CT-ND, Tolerance=20%, Voltage=6.3V, ComponentLink1Description=https://datasheet.ciiva.com/25767/1734359-25767741.pdf?src-supplier=Farnell, ComponentLink1URL=https://datasheet.ciiva.com/25767/1734359-25767741.pdf?src-supplier=Farnell, Diameter=5mm, Dissipation Factor=12%, Height=5.9mm, Height - Seated (Max)=0.236inch, Lead Free="Lead Free", Length=5.9mm, Life (Hours)=2000Hour, Manufacturer Part Number=6SVPE150M, Mount="Surface Mount", Number of Pins=6, Packaging="Tape and Reel", Polarity=Polar, Pricing 1="1 = 1.00000, 10 = 0.75800, 100 = 0.54210, 500 = 0.41972 (USD)", REACH SVHC="No SVHC", Ripple Current (AC)=3.52A, RoHS=Yes, Stock 1=8524, Supplier 1=Digi-Key, Termination=SMD/SMT, Voltage Rating=6.3V, Voltage Rating (DC)=6.3V
C25: "CAP CER 360pF 50V C0G 5% SMD 0805 125C Paper T/R", Capacitance=360pF, Case/Package=0805, Case Code (Metric)=2012, Dielectric=C0G, Manufacturer=Samsung, Max Operating Temperature=125°C, Min Operating Temperature=-55°C, Package Quantity=1, Supplier Part Number 1=1276-2650-2-ND, Tolerance=5%, Voltage Rating=50V, Case Code (Imperial)=0805, ComponentLink1Description=https://datasheet.ciiva.com/25772/cl21c361jbannnc-25772337.pdf?src-supplier=Digi-Key, ComponentLink1URL=https://datasheet.ciiva.com/25772/cl21c361jbannnc-25772337.pdf?src-supplier=Digi-Key, ComponentLink2Description=https://datasheet.ciiva.com/29200/453725-da-01-en-vs-kondensator-0805-29200056.pdf?src-supplier=Conrad, ComponentLink2URL=https://datasheet.ciiva.com/29200/453725-da-01-en-vs-kondensator-0805-29200056.pdf?src-supplier=Conrad, Depth=1.25mm, Height=0.65mm, Length=2mm, Manufacturer Part Number=CL21C361JBANNNC, Material=Ceramic, Mount="Surface Mount", Packaging="Tape and Reel", Pricing 1="4000 = 0.02290, 8000 = 0.02130, 12000 = 0.02024 (USD)", Radiation Hardening=No, RoHS=Yes, Stock 1=20000, Supplier 1=Digi-Key, Thickness=0.03inch, Voltage Rating (DC)=50V, Width=0.049inch
C27 C28: library part "16pF, 50V, 0603, SMD, Ceramic", "Capacitor, Ceramic, 50V, +/- 5%, 0603, SMD, C0G/NP0", Supplier Part Number 1=1276-2204-1-ND, Voltage=50V, Mfg="Samsung Electro-Mechanics America, Inc", Mfg#=CL10C160JB8NNNC, PackageDescription="Chip Capacitor", Published="November 2, 2013", Publisher="UVic AERO, Luke Mills", Supplier 1=Digi-Key, Verified=no
C29 C30: library part "4.3pF 50V 0603 SMD, Ceramic", "Capacitor, Ceramic, 50V, +/- 0.1pF, 0603 SMD, C0G, NP0", Supplier Part Number 1=1276-2308-1-ND, Mfg="Samsung Electro-Mechanics", Mfg#=CL10C4R3BB8NNNC, PackageDescription="Chip Capacitor", Published=2017-11-22, Publisher="UVic AERO, Taylor Long", Supplier 1=Digi-Key
C31: library part C0805C475K8PACTU, "CAP CER 4.7UF 10V, +/- 10%, 0805 SMD, X7R", Case/Package=0805, Dielectric=X5R, Dielectric Material=Ceramic, Manufacturer=KEMET, Max Operating Temperature=85°C, Min Operating Temperature=-55°C, Supplier Part Number 1=399-3133-1-ND, Tolerance=10%, Voltage Rating (DC)=10V, Capacitance=4.7uF, ComponentLink1Description=https://datasheet.ciiva.com/18193/getdatasheetpartid-179373-18193909.pdf?src-supplier=Verical, ComponentLink1URL=https://datasheet.ciiva.com/18193/getdatasheetpartid-179373-18193909.pdf?src-supplier=Verical, ComponentLink2Description=https://datasheet.ciiva.com/6126/40889-6126699.pdf?src-supplier=Farnell, ComponentLink2URL=https://datasheet.ciiva.com/6126/40889-6126699.pdf?src-supplier=Farnell, ComponentLink3Description=https://datasheet.ciiva.com/28614/1918694-28614763.pdf?src-supplier=Element14, ComponentLink3URL=https://datasheet.ciiva.com/28614/1918694-28614763.pdf?src-supplier=Element14, ComponentLink4Description=https://datasheet.ciiva.com/7842/40889-7842616.pdf?src-supplier=Element14, ComponentLink4URL=https://datasheet.ciiva.com/7842/40889-7842616.pdf?src-supplier=Element14, ComponentLink5Description=https://datasheet.ciiva.com/46385/1791935-46385676.pdf?src-supplier=Element14, ComponentLink5URL=https://datasheet.ciiva.com/46385/1791935-46385676.pdf?src-supplier=Element14, Depth=1.25mm, Height=1.25mm, LatestRevisionDate="April 29, 2010", Lead Free="Lead Free", Length=2mm, Manufacturer Part Number=C0805C475K8PACTU, Mount="Surface Mount", PackageDescription="Chip Capacitor", Packaging="Tape and Reel", Pricing 1="1 = 0.29000, 10 = 0.19500, 100 = 0.09860, 500 = 0.06746, 1000 = 0.05967 (USD)", Published="April 29, 2010", Publisher="TRAXX Automation Ltd.", Radiation Hardening=No, RoHS=Yes, Stock 1=393227, Supplier 1=Digi-Key
C37: library part C0805C103K5RACTU, "CAP CER 10nF 50V, +/- 10%, 0805 SMD, X7R C0805C103K5RACTU", Case/Package=0805, Case Code (Metric)=2012, Dielectric=X7R, Dielectric Material=Ceramic, Manufacturer=KEMET, Max Operating Temperature=125°C, Min Operating Temperature=-55°C, Package Quantity=1, Supplier Part Number 1=399-1158-1-ND, Tolerance=10%, Voltage Rating=50V, Capacitance=10nF, Case Code (Imperial)=0805, ComponentLink1Description=https://datasheet.ciiva.com/5904/kem-c1002-x7r-smd-5904709.pdf?src-supplier=Farnell, ComponentLink1URL=https://datasheet.ciiva.com/5904/kem-c1002-x7r-smd-5904709.pdf?src-supplier=Farnell, ComponentLink2Description=https://datasheet.ciiva.com/28672/1851736-28672830.pdf?src-supplier=Element14, ComponentLink2URL=https://datasheet.ciiva.com/28672/1851736-28672830.pdf?src-supplier=Element14, ComponentLink3Description=https://datasheet.ciiva.com/7842/kem-c1002-x7r-smd-7842533.pdf?src-supplier=Element14, ComponentLink3URL=https://datasheet.ciiva.com/7842/kem-c1002-x7r-smd-7842533.pdf?src-supplier=Element14, ComponentLink4Description=https://datasheet.ciiva.com/26923/getdatasheetpartid-759674-26923957.pdf?src-supplier=Verical, ComponentLink4URL=https://datasheet.ciiva.com/26923/getdatasheetpartid-759674-26923957.pdf?src-supplier=Verical, ComponentLink5Description=https://datasheet.ciiva.com/39122/docfinderpartnumberc0402c102k5ractu-39122923.pdf?src-supplier=Onlinecomponents.com, ComponentLink5URL=https://datasheet.ciiva.com/39122/docfinderpartnumberc0402c102k5ractu-39122923.pdf?src-supplier=Onlinecomponents.com, ComponentLink6Description=https://datasheet.ciiva.com/7172/1828800-7172412.pdf?src-supplier=Newark, ComponentLink6URL=https://datasheet.ciiva.com/7172/1828800-7172412.pdf?src-supplier=Newark, Depth=1.25mm, Height=0.78mm, Lead Pitch=0.75mm, Length=2mm, Manufacturer Part Number=C0805C103K5RACTU, Mount="Surface Mount", Number of Pins=2, PackageDescription="Chip Capacitor", Packaging="Tape and Reel", Published="August 31, 2013", Publisher="UVic AERO", Radiation Hardening=No, REACH SVHC="No SVHC", RoHS=Yes, Stock 2=0, Supplier 1=Digi-Key, Supplier 2="Allied Electronics", Supplier Part Number 2=70095550, Termination=SMD/SMT, Thickness=0.035inch, Voltage Rating (DC)=50V, Width=0.049inch
Css1 Css2: "CAP, 0.015µF, 50V, 5%, C0G/NP0, 0805", Capacitance=15nF, Case/Package=0805, Case Code (Metric)=2012, Dielectric=C0G, Manufacturer=TDK, Max Operating Temperature=125°C, Min Operating Temperature=-55°C, Package Quantity=1, Ratings=AEC-Q200, Supplier Part Number 1=445-6948-1-ND, Tolerance=5%, Voltage Rating=50V, Case Code (Imperial)=0805, ComponentLink1Description=https://datasheet.ciiva.com/24218/cga4f2c0g1h153j085aa-265904-24218633.pdf?src-supplier=Mouser, ComponentLink1URL=https://datasheet.ciiva.com/24218/cga4f2c0g1h153j085aa-265904-24218633.pdf?src-supplier=Mouser, ComponentLink2Description=https://datasheet.ciiva.com/7975/1807242-7975403.pdf?src-supplier=Element14, ComponentLink2URL=https://datasheet.ciiva.com/7975/1807242-7975403.pdf?src-supplier=Element14, Composition=Ceramic, Depth=1.25mm, Height=0.85mm, Lead Free="Lead Free", Length=2mm, Manufacturer Part Number=CGA4F2C0G1H153J085AA, Mount="Surface Mount", Packaging="Tape and Reel", Pricing 1="1 = 0.33000, 10 = 0.23000, 100 = 0.13800, 500 = 0.10350, 1000 = 0.08740 (USD)", REACH SVHC="No SVHC", RoHS=Yes, Stock 1=25718, Supplier 1=Digi-Key, Termination=SMD/SMT, Thickness=0.037inch, Voltage Rating (DC)=50V, Weight=0.000194oz, Width=0.049inch
Cvcc1 Cvcc2: "CAP CER 2.2UF 10V X7R 0805", Capacitance=2.2uF, Case/Package=0805, Case Code (Metric)=2012, Dielectric=X7R, Manufacturer="Taiyo Yuden", Max Operating Temperature=125°C, Min Operating Temperature=-55°C, Package Quantity=1, Supplier Part Number 1=587-1286-1-ND, Tolerance=10%, Voltage Rating=10V, Case Code (Imperial)=0805, ComponentLink1Description=https://datasheet.ciiva.com/11464/lmk212b7225kg-t-ss-11464065.pdf?src-supplier=Avnet, ComponentLink1URL=https://datasheet.ciiva.com/11464/lmk212b7225kg-t-ss-11464065.pdf?src-supplier=Avnet, ComponentLink2Description=https://datasheet.ciiva.com/30097/950lmk212b7225kg-t-30097799.pdf?src-supplier=Onlinecomponents.com, ComponentLink2URL=https://datasheet.ciiva.com/30097/950lmk212b7225kg-t-30097799.pdf?src-supplier=Onlinecomponents.com, ComponentLink3Description=https://datasheet.ciiva.com/15921/1069lmk212b7225kg-t-15921336.pdf?src-supplier=Onlinecomponents.com, ComponentLink3URL=https://datasheet.ciiva.com/15921/1069lmk212b7225kg-t-15921336.pdf?src-supplier=Onlinecomponents.com, ComponentLink4Description=https://datasheet.ciiva.com/26872/getdatasheetpartid-637084-26872681.pdf?src-supplier=Verical, ComponentLink4URL=https://datasheet.ciiva.com/26872/getdatasheetpartid-637084-26872681.pdf?src-supplier=Verical, Composition=Ceramic, Depth=1.25mm, Halogen Free="Halogen Free", Height=1.25mm, Lead Free="Lead Free", Length=2mm, Manufacturer Part Number=LMK212B7225KG-T, Mount="Surface Mount", Packaging="Tape and Reel", Pricing 1="1 = 0.21000, 10 = 0.14600, 100 = 0.06880, 500 = 0.04822, 1000 = 0.03993 (USD)", Radiation Hardening=No, REACH SVHC=Unknown, RoHS=Yes, Stock 1=73012, Supplier 1=Digi-Key, Termination=SMD/SMT, Thickness=0.053inch, Voltage Rating (DC)=10V, Width=1.25mm
E1 E2 E3 E4 E5 E6: library part "#2-56, w-Pin, Mounting Hole", "#2-56, with Pin, Mounting Hole", Published="Feb 8, 2014", Publisher="UVic AERO, KCMR"
J1 J2 J3: library part "Jumper, 0.1\" (2.54mm), Gold, THT, 68001-202HLF", "Jumper, 0.1\" (2.54mm), Gold, THT, 68001-202HLF & 3M9580-ND", Mfg=FCI, Mfg#=68001-202HLF, Published=2014-10-19, Publisher="UVic AERO, Kirk Richardson", Supplier 1=Digi-Key, Supplier 2=Digi-Key, Supplier Part Number 1=3M9580-ND, Supplier Part Number 2=609-3469-ND, Verified=No
L1: "FIXED IND 4.7uH 20% SMD 1270", Case/Package=1270, Current=35A, Current Rating=15A, DC Resistance (DCR)=11.2mR, Inductance=4.7uH, Inductance Tolerance=20%, Manufacturer=Bourns, Max Operating Temperature=125°C, Min Operating Temperature=-55°C, Package Quantity=400, Saturation Current=30A, Self Resonant Frequency=15MHz, Supplier Part Number 1=SRP1270-4R7MCT-ND, Test Frequency=100kHz, ComponentLink1Description=https://datasheet.ciiva.com/11803/0900766b80f2b679-11803001.pdf?src-supplier=RSComponents, ComponentLink1URL=https://datasheet.ciiva.com/11803/0900766b80f2b679-11803001.pdf?src-supplier=RSComponents, ComponentLink2Description=https://datasheet.ciiva.com/17286/srp1270-17286216.pdf?src-supplier=Avnet+Europe, ComponentLink2URL=https://datasheet.ciiva.com/17286/srp1270-17286216.pdf?src-supplier=Avnet+Europe, ComponentLink3Description=https://datasheet.ciiva.com/30242/484srp1270-30242620.pdf?src-supplier=Onlinecomponents.com, ComponentLink3URL=https://datasheet.ciiva.com/30242/484srp1270-30242620.pdf?src-supplier=Onlinecomponents.com, ComponentLink4Description=https://datasheet.ciiva.com/17045/70277161-17045933.pdf?src-supplier=Allied+Electronics, ComponentLink4URL=https://datasheet.ciiva.com/17045/70277161-17045933.pdf?src-supplier=Allied+Electronics, ComponentLink5Description=https://datasheet.ciiva.com/8515/srp1270-8515814.pdf?src-supplier=Avnet, ComponentLink5URL=https://datasheet.ciiva.com/8515/srp1270-8515814.pdf?src-supplier=Avnet, ComponentLink6Description=https://datasheet.ciiva.com/8517/srp1270-8517062.pdf?src-supplier=Avnet, ComponentLink6URL=https://datasheet.ciiva.com/8517/srp1270-8517062.pdf?src-supplier=Avnet, ComponentLink7Description=https://datasheet.ciiva.com/7849/1834359-7849561.pdf?src-supplier=Element14, ComponentLink7URL=https://datasheet.ciiva.com/7849/1834359-7849561.pdf?src-supplier=Element14, Composition=Wirewound, Core Material=Ferrite, DC Current=15A, Depth=13.7mm, Height=7mm, Height - Seated (Max)=0.276inch, Length=13.7mm, Manufacturer Part Number=SRP1270-4R7M, Max DC Current=15A, Military Standard=Not, Mount="Surface Mount", Number of Pins=2, Packaging="Tape and Reel", Pricing 1="1 = 1.68000, 10 = 1.55300, 100 = 1.08680 (USD)", REACH SVHC="No SVHC", RMS Current (Irms)=15A, RoHS=Yes, Shielding=Shielded, Stock 1=8527, Supplier 1=Digi-Key, Termination=SMD/SMT, Tolerance=20%, Width=13.7mm
L2: "FIXED IND 4.5UH 6.5A 14 MOHM SMD", Case/Package=1208, Current Rating=6.5A, DC Resistance (DCR)=14mR, Frequency=30MHz, Inductance=4.5uH, Inductance Tolerance=20%, Manufacturer=Bourns, Max Operating Temperature=125°C, Min Operating Temperature=-40°C, Package Quantity=400, Resistance=14MR, Saturation Current=10A, Supplier Part Number 1=SRR1208-4R5MLCT-ND, Test Frequency=1kHz, ComponentLink1Description=https://datasheet.ciiva.com/11803/0900766b80defdeb-11803005.pdf?src-supplier=RSComponents, ComponentLink1URL=https://datasheet.ciiva.com/11803/0900766b80defdeb-11803005.pdf?src-supplier=RSComponents, ComponentLink2Description=https://datasheet.ciiva.com/1060/srr1208-1060209.pdf?src-supplier=Digi-Key, ComponentLink2URL=https://datasheet.ciiva.com/1060/srr1208-1060209.pdf?src-supplier=Digi-Key, ComponentLink3Description=https://datasheet.ciiva.com/1060/srr1208-1060210.pdf?src-supplier=Digi-Key, ComponentLink3URL=https://datasheet.ciiva.com/1060/srr1208-1060210.pdf?src-supplier=Digi-Key, ComponentLink4Description=https://datasheet.ciiva.com/30091/srr1208-30091109.pdf?src-supplier=Onlinecomponents.com, ComponentLink4URL=https://datasheet.ciiva.com/30091/srr1208-30091109.pdf?src-supplier=Onlinecomponents.com, ComponentLink5Description=https://datasheet.ciiva.com/17285/srr1208-17285910.pdf?src-supplier=Avnet+Europe, ComponentLink5URL=https://datasheet.ciiva.com/17285/srr1208-17285910.pdf?src-supplier=Avnet+Europe, ComponentLink6Description=https://datasheet.ciiva.com/7849/1483756-7849582.pdf?src-supplier=Element14, ComponentLink6URL=https://datasheet.ciiva.com/7849/1483756-7849582.pdf?src-supplier=Element14, Composition=Wirewound, Core Material=Ferrite, DC Current=6.5A, Depth=13mm, Height=8.5mm, Height - Seated (Max)=0.335inch, Length=12.7mm, Manufacturer Part Number=SRR1208-4R5ML, Material=Steel, Max DC Current=6.5A, Military Standard=Not, Mount="Surface Mount", Packaging="Tape and Reel", Pricing 1="1 = 1.13000, 10 = 1.04700, 100 = 0.75670 (USD)", Q Factor=24, REACH SVHC="No SVHC", RMS Current (Irms)=6.5A, RoHS=Yes, Self Resonant Frequency=30MHz, Shielding=Shielded, Stock 1=831, Supplier 1=Digi-Key, Termination=SMD/SMT, Tolerance=20%, Width=0.5inch
L3: library part BK1608HS601-T, "FERRITE BEAD 600 OHM 0603 1LN", Case/Package=0603, Case Code (Metric)=1608, DC Resistance (DCR)=450mR, Frequency=100MHz, Manufacturer="Taiyo Yuden", Max Current Rating=350mA, Max Operating Temperature=125°C, Min Operating Temperature=-55°C, Package Quantity=1, Supplier Part Number 1=587-1874-1-ND, Tolerance=25%, Case Code (Imperial)=0603, ComponentLink1Description=https://datasheet.ciiva.com/1011/bk1608hs601-t-ss-1011856.pdf?src-supplier=Digi-Key, ComponentLink1URL=https://datasheet.ciiva.com/1011/bk1608hs601-t-ss-1011856.pdf?src-supplier=Digi-Key, ComponentLink2Description=https://datasheet.ciiva.com/30231/126bk1608hs601-t-30231402.pdf?src-supplier=Onlinecomponents.com, ComponentLink2URL=https://datasheet.ciiva.com/30231/126bk1608hs601-t-30231402.pdf?src-supplier=Onlinecomponents.com, ComponentLink3Description=https://datasheet.ciiva.com/16000/bk1608hs601-t1-16000876.pdf?src-supplier=Onlinecomponents.com, ComponentLink3URL=https://datasheet.ciiva.com/16000/bk1608hs601-t1-16000876.pdf?src-supplier=Onlinecomponents.com, ComponentLink4Description=https://datasheet.ciiva.com/1011/mlci07-e-1011857.pdf?src-supplier=Digi-Key, ComponentLink4URL=https://datasheet.ciiva.com/1011/mlci07-e-1011857.pdf?src-supplier=Digi-Key, ComponentLink5Description=https://datasheet.ciiva.com/1011/mlci07-e-1011855.pdf?src-supplier=Digi-Key, ComponentLink5URL=https://datasheet.ciiva.com/1011/mlci07-e-1011855.pdf?src-supplier=Digi-Key, Core Material=Ferrite, Depth=0.95mm, Halogen Free="Halogen Free", Height=0.95mm, Impedance=600R, Lead Free="Lead Free", Length=0.063inch, Manufacturer Part Number=BK1608HS601-T, Max DC Current=350mA, Mount="Surface Mount", Number of Lines=1, Number of Pins=2, Packaging="Tape and Reel", Pricing 1="1 = 0.10000, 10 = 0.07900, 25 = 0.07200, 50 = 0.06480, 100 = 0.04760, 250 = 0.03460, 500 = 0.03170, 1000 = 0.02738 (USD)", REACH SVHC=Unknown, RoHS=Yes, Shielding=Shielded, Stock 1=27923, Supplier 1=Digi-Key, Termination=SMD/SMT, Test Frequency=100MHz, Width=0.031inch
M1: "MOSFET N-CH 40V 8SON", Continuous Drain Current (ID)=50A, Drain to Source Breakdown Voltage=40V, Drain to Source Resistance=7.5mR, Gate to Source Voltage (Vgs)=20V, Input Capacitance=1.656nF, Manufacturer="Texas Instruments", Max Operating Temperature=150°C, Max Power Dissipation=3.1W, Min Operating Temperature=-55°C, Package Quantity=1, Supplier Part Number 1=296-30572-1-ND, Threshold Voltage=1.9V, ComponentLink1Description=https://datasheet.ciiva.com/14192/csd18504q5a-14192913.pdf?src-supplier=Avnet, ComponentLink1URL=https://datasheet.ciiva.com/14192/csd18504q5a-14192913.pdf?src-supplier=Avnet, ComponentLink2Description=https://datasheet.ciiva.com/13063/csd18504q5a-123974-13063385.pdf?src-supplier=Mouser, ComponentLink2URL=https://datasheet.ciiva.com/13063/csd18504q5a-123974-13063385.pdf?src-supplier=Mouser, ComponentLink3Description=https://datasheet.ciiva.com/6386/csd18504q5a-6386886.pdf?src-supplier=Digi-Key, ComponentLink3URL=https://datasheet.ciiva.com/6386/csd18504q5a-6386886.pdf?src-supplier=Digi-Key, ComponentLink4Description=https://datasheet.ciiva.com/6386/csd18504q5a-6386887.pdf?src-supplier=Digi-Key, ComponentLink4URL=https://datasheet.ciiva.com/6386/csd18504q5a-6386887.pdf?src-supplier=Digi-Key, ComponentLink5Description=https://datasheet.ciiva.com/6386/csd18504q5a-6386888.pdf?src-supplier=Digi-Key, ComponentLink5URL=https://datasheet.ciiva.com/6386/csd18504q5a-6386888.pdf?src-supplier=Digi-Key, ComponentLink6Description=https://datasheet.ciiva.com/26147/csd18504q5a-26147849.pdf?src-supplier=Avnet+Europe, ComponentLink6URL=https://datasheet.ciiva.com/26147/csd18504q5a-26147849.pdf?src-supplier=Avnet+Europe, Contact Plating=Tin, Drain to Source Voltage (Vdss)=40V, Element Configuration=Single, Fall Time=2ns, Height=1.1mm, Length=5.8mm, Manufacturer Part Number=CSD18504Q5A, Mount="Surface Mount", Number of Elements=1, Number of Pins=8, Packaging="Tape and Reel", Power Dissipation=3.1W, Pricing 1="1 = 1.12000, 10 = 0.99000, 100 = 0.78230, 500 = 0.60668, 1000 = 0.47895 (USD)", Radiation Hardening=No, Rds On Max=6.6mR, REACH SVHC="No SVHC", Rise Time=6.8ns, RoHS=Yes, Stock 1=72450, Supplier 1=Digi-Key, Turn-Off Delay Time=12ns, Turn-On Delay Time=3.2ns, Width=5mm